# Altium PCB Battery_Monitor_4Cell.pcbdoc
Units mm, origin at the board's own origin, x right, y up, seen from the top; angles counter-clockwise.
Board outline 152.4 x 101.6 mm, 2 copper layers (Top Layer, Bottom Layer); 18 components, 20 nets, 70 pads, 12 vias.
Unrouted connection lines stored in the file: 1.
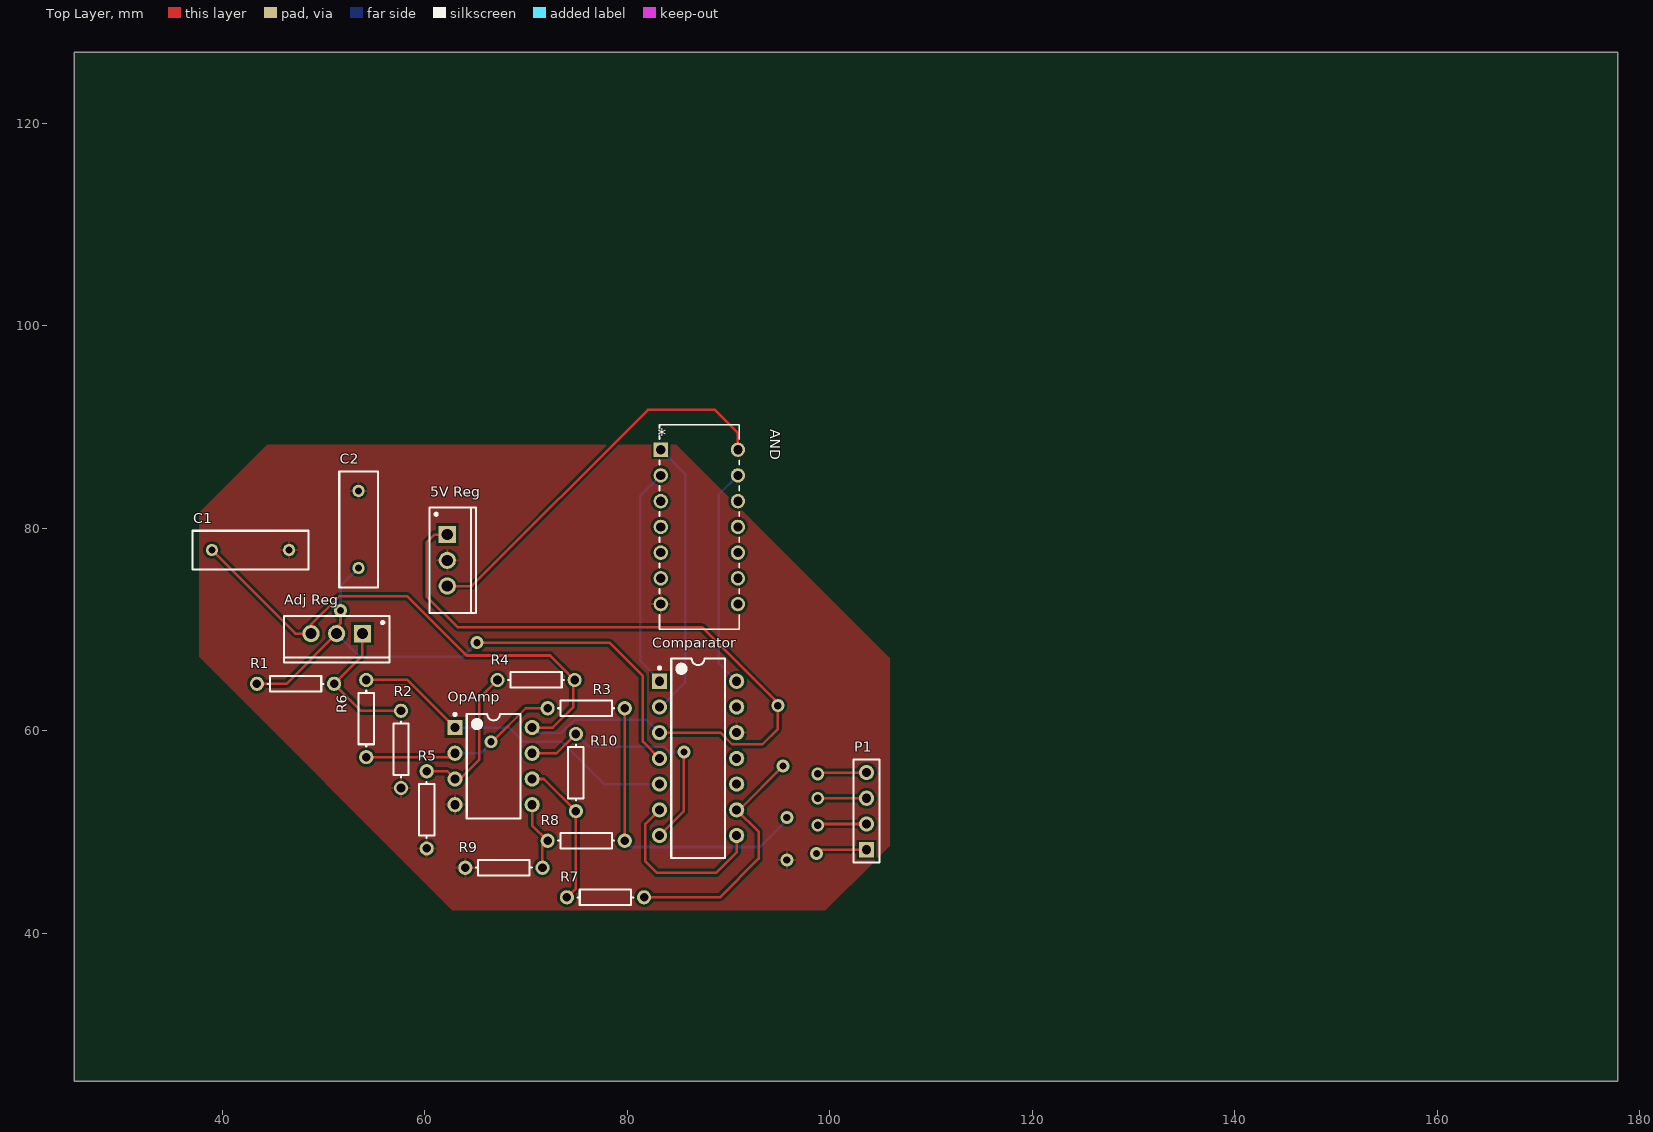
[diagram p0: Top Layer view]
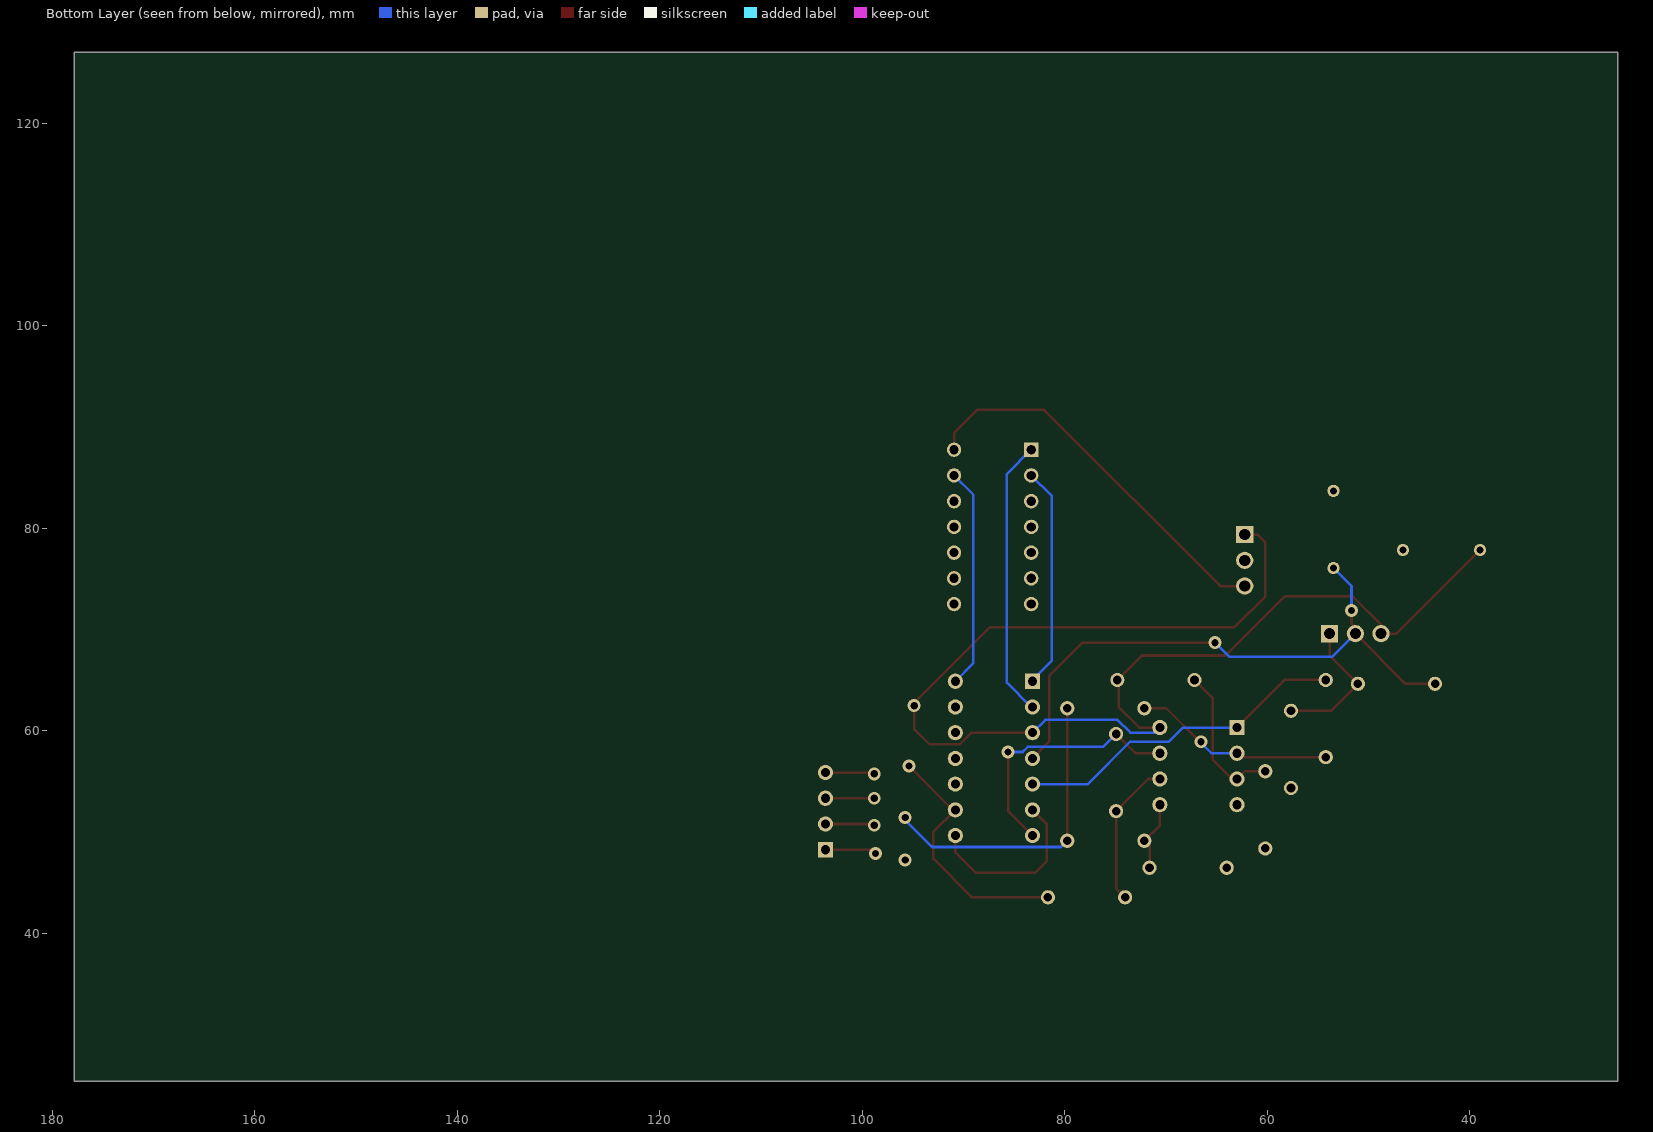
[diagram p1: Bottom Layer view, seen from below]

## Layer stack, top to bottom
Top Solder: solder mask 0.0102, Solder Resist, Dk 3.5
Top Layer: signal copper 0.0356
Dielectric 1: dielectric 0.32, FR-4, Dk 4.8
Bottom Layer: signal copper 0.0356
Bottom Solder: solder mask 0.0102, Solder Resist, Dk 3.5

## Board outline
25.4,25.4 177.8,25.4 177.8,127 25.4,127

## Design rules (kind name [scope] priority, off if disabled: settings)
Clearance [All] p1: gap=0.254 ignorepadtopadclearanceinfootprint=FALSE except(0: Arc-Hole Track-Hole SMDPad-Hole THPad-Hole Via-Hole Fill-Hole Poly-Hole Region-Hole Text-Hole)
PolygonConnect [All] p1: connectstyle=Relief reliefconductorwidth=0.254 reliefentries=4 polygonreliefangle="90 Angle" airgapwidth=0.254
RoomDefinition Battery_Monitor [InComponentClass('Battery_Monitor')] p1: confinementstyle=ConfineIn formatcopy=TRUE lockcomponents=FALSE outline 251.841,94.742 230.632,94.742 230.632,75.057 251.841,75.057
RoutingVias [All] p1: holewidth=0.711 width=1.27 viastyle="Through Hole" minholewidth=0.711 minwidth=1.27 maxholewidth=0.711 maxwidth=1.27
SolderMaskExpansion [All] p1: expansion=0.102
Width [All] p1: maxlimit=0.254 minlimit=0.254 preferedwidth=0.254
30 further rules are at their usual default settings.

## Classes and differential pairs
component class Battery_Monitor: C?

## Components (designator, comment, footprint, x,y, rotation, side; value= is the part's Value field where it differs from the comment)
"5V Reg" "L7805ABV" TO220 62.23,76.835 r270 top
"Adj Reg" "LM317T" TO-220 51.308,69.596 r180 top
AND "SN54HC11J" J14 90.932,72.517 r0 top
C1 "Cap" RAD-0.3 42.799,77.851 r180 top
C2 "Cap" RAD-0.3 53.467,79.883 r90 top
Comparator "LM339N" N14A 86.995,57.277 r0 top
OpAmp "LMC662" N08E 66.802,56.515 r0 top
P1 "Header 4" HDR1X4 103.632,48.26 r90 top
R1 "Res1" AXIAL-0.3 47.244,64.643 r180 top
R2 "Res1" AXIAL-0.3 57.658,58.166 r90 top
R3 "Res1" AXIAL-0.3 75.946,62.23 r180 top
R4 "Res1" AXIAL-0.3 70.993,65.024 r180 top
R5 "Res1" AXIAL-0.3 60.198,52.197 r90 top
R6 "Res1" AXIAL-0.3 54.229,61.214 r90 top
R7 "Res1" AXIAL-0.3 77.851,43.561 r180 top
R8 "Res1" AXIAL-0.3 75.946,49.149 r180 top
R9 "Res1" AXIAL-0.3 67.818,46.482 r0 top
R10 "Res1" AXIAL-0.3 74.93,55.88 r90 top

## Footprints (in the part's own frame and the unit in brackets; to place one, negate y for a bottom-side part, rotate by r counter-clockwise, add the part's x,y. Pads: shape width x height; smd on the part's side, far side on the other; paste and mask are expansions set on the pad)
AXIAL-0.3 [mm] "Axial Device, Thru-Hole; 2 Leads; 0.3 in Pin Spacing"
  round 1.4 hole 0.85: 1(-3.81,0) 2(3.81,0)
  silkscreen extent -2.77,-0.76 2.77,0.76
HDR1X4 [mm] "Connector; Header; 4 Position"
  rect 1.5x1.5 hole 0.9: 1(0,0)
  round 1.5 hole 0.9: 2(2.54,0) 3(5.08,0) 4(7.62,0)
  silkscreen extent -1.27,-1.27 8.89,1.27
J14 [mil]
  rect 56x56 hole 36 mask+0: 1(-300,600)
  round 56 hole 36 mask+0: 2(-300,500) 3(-300,400) 4(-300,300) 5(-300,200) 6(-300,100) 7(-300,0) 8(0,0) 9(0,100) 10(0,200) 11(0,300) 12(0,400) 13(0,500) 14(0,600)
  silkscreen extent -305,-98 5,698, body extent 0,0 10,10, height 10
N08E [mm] "DIP, 8-Pin, Row Spacing 7.62 mm, Pitch 2.54 mm"
  rect 1.5x1.5 hole 0.9: 1(-3.81,3.81)
  round 1.5 hole 0.9: 2(-3.81,1.27) 3(-3.81,-1.27) 4(-3.81,-3.81) 5(3.81,-3.81) 6(3.81,-1.27) 7(3.81,1.27) 8(3.81,3.81)
  silkscreen extent -3.93,-5.15 2.65,5.23, body extent -3.6,-5.15 3.6,5.15, height 5.34
N14A [mm] "DIP, 14-Pin, Row Spacing 7.62 mm, Pitch 2.54 mm"
  rect 1.5x1.5 hole 0.9: 1(-3.81,7.62)
  round 1.5 hole 0.9: 2(-3.81,5.08) 3(-3.81,2.54) 4(-3.81,0) 5(-3.81,-2.54) 6(-3.81,-5.08) 7(-3.81,-7.62) 8(3.81,-7.62) 9(3.81,-5.08) 10(3.81,-2.54) 11(3.81,0) 12(3.81,2.54) 13(3.81,5.08) 14(3.81,7.62)
  silkscreen extent -3.93,-9.85 2.65,9.85, body extent -3.55,-9.85 3.55,9.85, height 5.08
RAD-0.3 [mm] "Radial Cap, Thru-Hole; 2 Leads; 0.3 in Pin Spacing"
  round 1.2 hole 0.7: 1(-3.81,0) 2(3.81,0)
  silkscreen extent -5.71,-1.91 5.71,1.91
TO220 [mm] "TO, Thru-Hole, Vertical, Heatsink Mounted; 3 In-Line Leads; Pitch 2.54 mm"
  rect 1.7x1.7 hole 1.1: 1(-2.54,0)
  round 1.7 hole 1.1: 2(0,0) 3(2.54,0)
  silkscreen extent -5.2,-1.75 5.2,2.85, body extent -5.25,-1.8 5.25,2.9, height 19.7
TO-220 [mm] "TO, Thru-Hole, Vertical, Heatsink Mounted; 3 In-Line Leads; Pitch 2.54 mm"
  rect 1.7x1.7 hole 1.1: 1(-2.54,0)
  round 1.7 hole 1.1: 2(0,0) 3(2.54,0)
  silkscreen extent -5.2,-1.75 5.2,2.85, body extent -5.25,-1.8 5.25,2.9, height 19.7

## Part data
"5V Reg": "Positive Voltage Regulator, 5V, 3-Pin TO-220"
"Adj Reg": "1.5A, 1.2V to 37V Adjustable Voltage Regulator, 3-Pin TO-220"
AND: "No Description Available"
C1 C2: "Capacitor"
Comparator: "Low Power Low Offset Voltage Quad Comparator, 14-pin MDIP"
OpAmp: library part LMC662AIN, "CMOS Dual Operational Amplifier, 8-pin MDIP"
P1: "Header, 4-Pin"
R1 R2 R3 R4 R5 R6 R7 R8 R9 R10: "Resistor"

## Via types
v1: diameter 1.27, hole 0.711, Top Layer to Bottom Layer, 12 vias

## Nets (pads, with @x,y where several pads share a name; then routed paths per layer and width w, separated by ;. In a path a pad name is that pad's centre, name@x,y a point inside that pad or via, vN(x,y) a via of type N, cw(c..) or ccw(c..) an arc to the next point about the centre after c; other vN are vias at no path point)
3.6V: "Adj Reg.2" C2.1 Comparator.4 Comparator.6 Comparator.8 R1.2 | length 76.9
  Top Layer w0.254: R1.2 46.355,64.643 51.308,69.596 51.308,70.231 51.689,70.612 v1(51.689,71.882) ; v1(65.151,68.707) 78.232,68.707 81.534,65.405 81.534,58.928 Comparator.4 ; Comparator.6 81.788,50.8 81.788,47.117 82.931,45.974 88.773,45.974 90.805,48.006 Comparator.8
  Bottom Layer w0.254: 51.308,69.596 53.594,67.31 63.754,67.31 v1(65.151,68.707) ; v1(51.689,71.882) 51.689,74.295 C2.1
4VI: Comparator.9 R7.1 | length 25
  Top Layer w0.254: R7.1 89.154,43.561 92.964,47.371 92.964,50.038 Comparator.9 91.059,52.197 v1(95.377,56.515)
4VO: P1.2 | length 4.9
  Top Layer w0.254: v1(98.806,50.673) 98.933,50.8 P1.2
5V: "5V Reg.3" AND.14 | length 38.5
  Top Layer w0.254: 62.23,74.295 64.643,74.295 82.042,91.694 88.646,91.694 90.932,89.408 AND.14
8VI: R3.1 R8.1 | length 30.7
  Top Layer w0.254: R8.1 R3.1
  Bottom Layer w0.254: R8.1 80.379,48.526 93.103,48.526 95.758,51.181 v1(95.758,51.435)
8VO: P1.3 | length 4.8
  Top Layer w0.254: v1(98.806,53.34) P1.3
12VI: "5V Reg.1" "Adj Reg.3" C1.2 Comparator.3 OpAmp.8 R4.1 | length 128.6
  Top Layer w0.254: C1.2 47.244,69.596 48.768,69.596 48.768,70.485 51.562,73.279 58.293,73.279 64.135,67.437 72.39,67.437 R4.1 74.676,64.897 74.676,62.357 72.644,60.325 OpAmp.8 ; 62.23,79.375 60.96,79.375 60.198,78.613 60.198,73.279 63.246,70.231 87.376,70.231 95.123,62.484 v1(94.869,62.484) 94.869,60.198 93.345,58.674 90.349,58.674 89.206,59.817 Comparator.3
  Bottom Layer w0.254: OpAmp.8 71.12,59.817 73.528,59.817 74.798,61.087 81.915,61.087 Comparator.3
12VO: P1.4 | length 4.9
  Top Layer w0.254: v1(98.806,55.753) 98.933,55.88 P1.4
CELL1: AND.13 Comparator.14 | length 21.8
  Bottom Layer w0.254: Comparator.14 89.027,66.675 89.027,83.312 AND.13
CELL2: AND.2 Comparator.1 | length 22
  Bottom Layer w0.254: Comparator.1 83.185,65.024 81.28,66.929 81.28,83.185 AND.2
CELL3: AND.1 Comparator.2 | length 27.5
  Bottom Layer w0.254: Comparator.2 83.312,62.357 85.725,64.77 85.725,85.344 AND.1
GND: "5V Reg.2" AND.7 C1.1 C2.2 Comparator.12 OpAmp.4 R2.1 R5.1 R9.1
  other v1: 95.758,47.244
GNDO: P1.1 | length 5.1
  Top Layer w0.254: v1(98.679,47.879) 99.06,48.26 P1.1
"NetAdj Reg_1": "Adj Reg.1" R1.1 R2.2 | length 13.8
  Top Layer w0.254: 53.848,69.596 53.848,67.437 R1.1 53.721,61.976 R2.2
NetComparator_5: Comparator.5 OpAmp.1 R6.2 | length 33.2
  Top Layer w0.254: R6.2 58.293,65.024 OpAmp.1
  Bottom Layer w0.254: OpAmp.1 68.326,60.325 69.723,58.928 73.533,58.928 77.724,54.737 Comparator.5
NetComparator_7: Comparator.7 OpAmp.7 R10.2 | length 26
  Top Layer w0.254: OpAmp.7 73.025,57.785 74.676,59.436 R10.2@75.438,59.436 ; Comparator.7 85.598,52.07 v1(85.598,57.912) v1@85.725,58.039
  Bottom Layer w0.254: R10.2@75.184,59.436 76.212,58.408 83.653,58.408 84.149,57.912 v1(85.598,57.912)
NetOpAmp_2: OpAmp.2 R3.2 R6.1 | length 20
  Top Layer w0.254: R6.1 62.611,57.404 OpAmp.2 ; v1(66.548,58.928) 66.675,58.928 69.977,62.23 R3.2
  Bottom Layer w0.254: OpAmp.2 65.532,57.785 66.548,58.801 v1(66.548,58.928)
NetOpAmp_3: OpAmp.3 R4.2 R5.2 | length 14.9
  Top Layer w0.254: R5.2 62.23,56.007 OpAmp.3 63.5,55.245 65.405,57.15 65.405,63.246 R4.2
NetOpAmp_5: OpAmp.5 R8.2 R9.2 | length 7.1
  Top Layer w0.254: OpAmp.5 70.612,50.673 R8.2 71.628,48.641 R9.2
NetOpAmp_6: OpAmp.6 R7.2 R10.1 | length 14.5
  Top Layer w0.254: OpAmp.6 71.755,55.245 R10.1 74.93,44.45 R7.2
pads on no net: AND.3 AND.4 AND.5 AND.6 AND.8 AND.9 AND.10 AND.11 AND.12 Comparator.10 Comparator.11 Comparator.13

## Polygon pours and split planes (outlines as drawn)
GND on Top Layer "GND" (solid, pour order 0): 37.719,81.534 44.45,88.265 84.836,88.265 105.918,67.183 105.918,48.641 99.568,42.291 62.738,42.291 37.719,67.31

## Text inside footprints (layer, text, board x,y; h text height)
AND: Top Overlay "*" at 82.995,88.595 h1.27; Mechanical 7 "0.785in/19.939mm" at 93.98,79.819 h0.64; Mechanical 7 "0.3in/7.62mm" at 85.217,90.805 h0.64; Mechanical 7 "0.3in/7.62mm" at 85.217,68.834 h0.64; Mechanical 7 "0.1in/2.54mm" at 76.454,86.169 h0.64; Mechanical 7 "Alt 2 Padstyle: b229_152h76" at 78.549,60.008 h1.27; Mechanical 7 "Alt 1 Padstyle: b152_229h76" at 78.549,61.277 h1.27; Mechanical 7 "Pin 1 Padstyle: s142h91" at 79.819,62.547 h1.27; Mechanical 7 "Default Padstyle: c142h91" at 79.184,65.087 h1.27; Mechanical 13 "*" at 83.248,87.122 h1.27